# Altium PCB Main and Power management boad_V1.PcbDoc
Units mm, origin at the board's own origin, x right, y up, seen from the top; angles counter-clockwise.
Board outline 99 x 99 mm, 2 copper layers (Top Layer, Bottom Layer); 109 components, 71 nets, 442 pads, 379 vias.
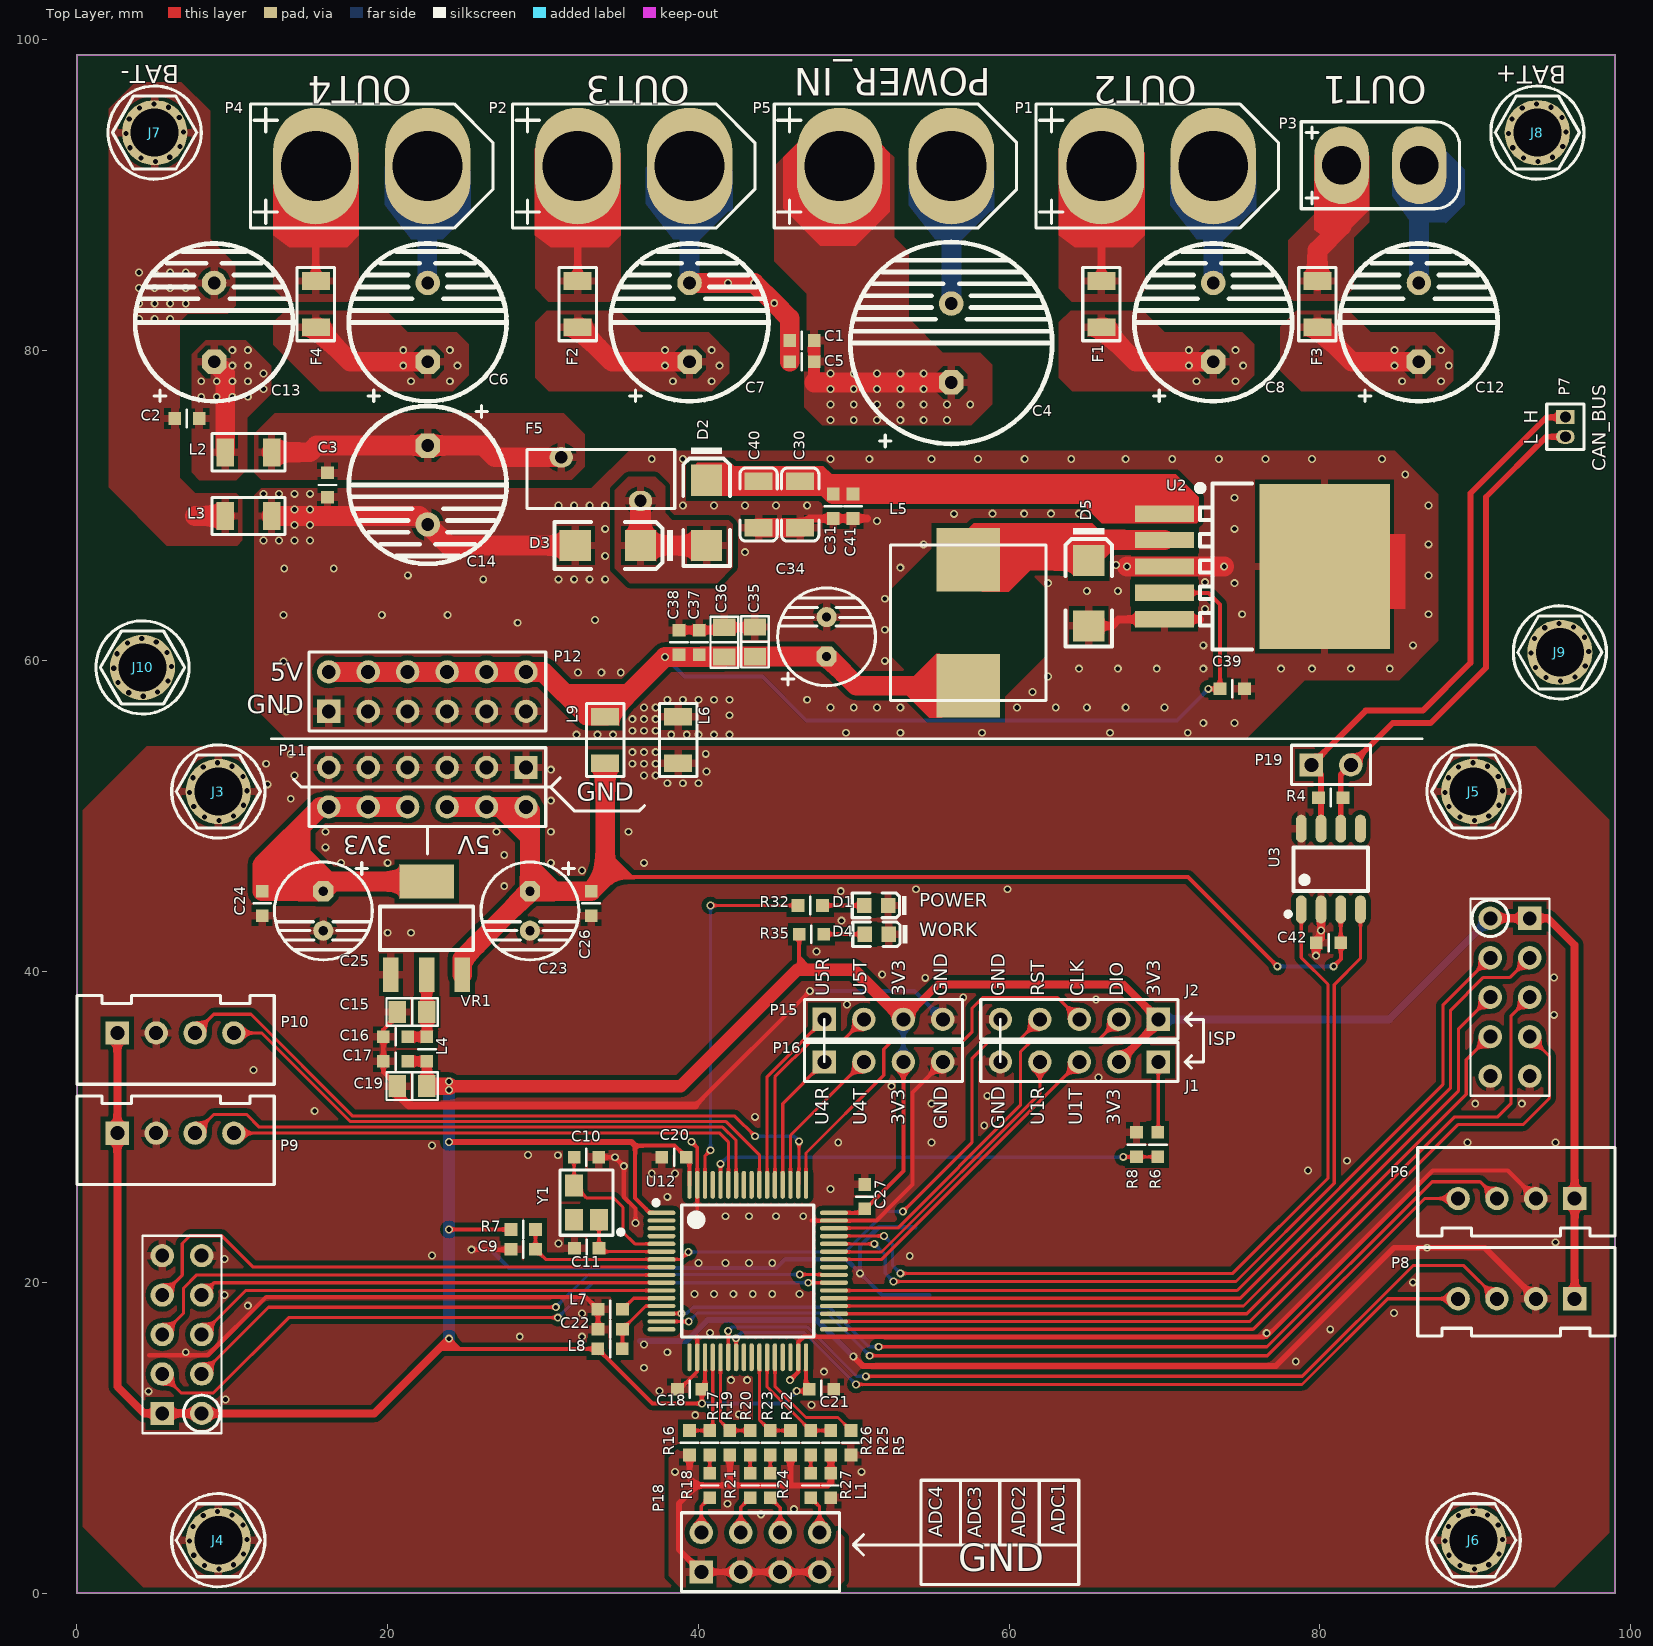
[diagram p0: Top Layer view]
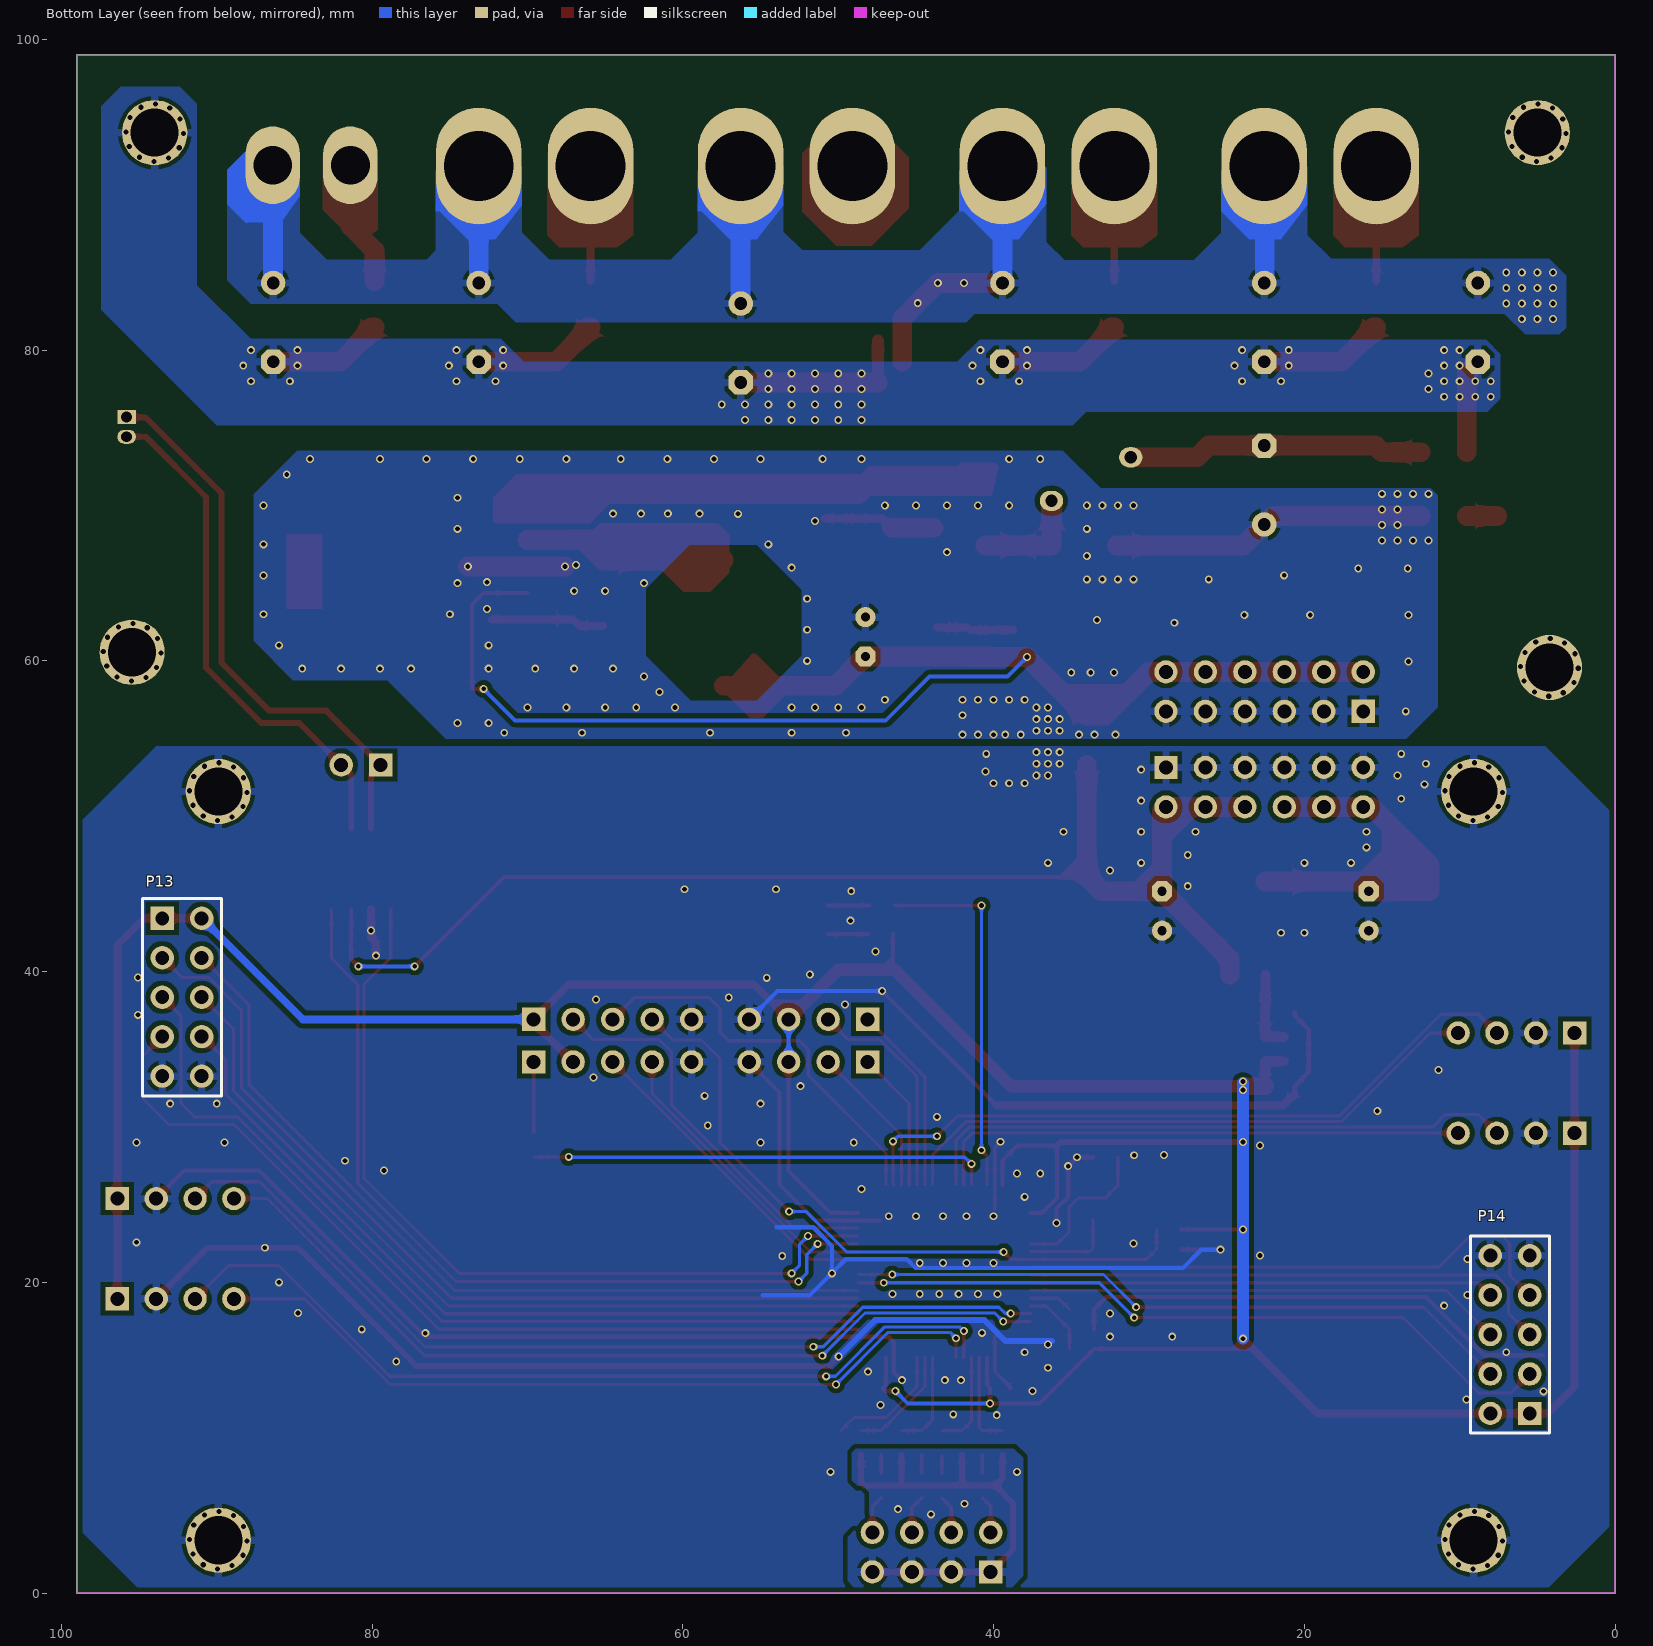
[diagram p1: Bottom Layer view, seen from below]

## Layer stack, top to bottom
Top Solder: solder mask 0.0102, Solder Resist, Dk 3.5
Top Layer: signal copper 0.0356
Dielectric 1: dielectric 0.32, FR-4, Dk 4.8
Bottom Layer: signal copper 0.0356
Bottom Solder: solder mask 0.0102, Solder Resist, Dk 3.5

## Board outline
0,0 99,0 99,99 0,99

## Design rules (kind name [scope] priority, off if disabled: settings)
Clearance Clearance_Polygon [InPolygon] p1: gap=0.305 ignorepadtopadclearanceinfootprint=FALSE
Clearance Clearance_all [All] p2: gap=0.152 ignorepadtopadclearanceinfootprint=FALSE
ComponentClearance [All] p1: gap=0 collisioncheckmode=3 verticalgap=0 showdistances=FALSE
HoleSize [All] p1 off: absolutevalues=TRUE maxlimit=2.54 minlimit=0.025 maxpercent=80.000 minpercent=20.000
HoleToHoleClearance [All] p1 off: gap=0.254 allowstackedmicrovias=TRUE
MinimumSolderMaskSliver [All] p1 off: minsoldermaskwidth=0.254
PolygonConnect PolygonConnect_via [IsVia] p1: connectstyle=Direct reliefconductorwidth=0.254 reliefentries=4 polygonreliefangle="90 Angle" airgapwidth=0.254
PolygonConnect Plane_all [All] p2: connectstyle=Relief reliefconductorwidth=0.508 reliefentries=4 polygonreliefangle="90 Angle" airgapwidth=0.254
RoutingVias [All] p1: holewidth=0.3 width=0.5 viastyle="Through Hole" minholewidth=0.305 minwidth=0.508 maxholewidth=3.2 maxwidth=6
SilkToSilkClearance [All] p1 off: silktosilkclearance=0.254
SilkToSolderMaskClearance [IsPad] p1 off: minsilkscreentomaskgap=0.254 clearancetoexposedcopper=TRUE
SolderMaskExpansion [All] p1 off: expansion=0.102
Width [All] p1: maxlimit=5.08 minlimit=0.152 preferedwidth=0.254
24 further rules are at their usual default settings.

## Components (designator, comment, footprint, x,y, rotation, side; value= is the part's Value field where it differs from the comment)
C1 "1uF 10% 50V" C1608(CC0603) 46.663,80.625 r180 top value=1uF/25V
C2 "1nF/50V" C1608(CC0603) 7.075,75.6 r0 top value="33pF 5%"
C3 "1nF/50V" C1608(CC0603) 16.125,71.32 r90 top value="33pF 5%"
C4 "1000uF/35V" RB.5/.13mm 56.275,80.46 r90 top locked value=KF102M025G200A
C5 "33pF/50V" C1608(CC0603) 46.663,79.258 r0 top value="33pF 5%"
C6 "470uF/35V" RB.5/.10mm 22.575,81.785 r90 top value=KF102M025G200A
C7 "470uF/35V" RB.5/.10mm 39.43,81.785 r90 top locked value=KF102M025G200A
C8 "470uF/35V" RB.5/.10mm 73.14,81.785 r90 top locked value=KF102M025G200A
C9 "1uF 10% 50V" C1608(CC0603) 28.726,22.13 r0 top value=0.1uF
C10 "22pF" C1608(CC0603) 32.787,28.05 r0 top value=100pF
C11 "22pF" C1608(CC0603) 32.814,22.2 r180 top value=100pF
C12 "470uF/35V" RB.5/.10mm 86.375,81.785 r90 top locked value=KF102M025G200A
C13 "470uF/35V" RB.5/.10mm 8.825,81.785 r90 top value=KF102M025G200A
C14 "470uF/35V" RB.5/.10mm 22.575,71.32 r270 top locked value=KF102M025G200A
C15 "10uF/25V/0805" C2012(CC0805) 21.572,37.4 r0 top
C16 "1nF/50V" C1608(CC0603) 20.513,35.8 r0 top value=1nF
C17 "1nF/50V" C1608(CC0603) 20.513,34.225 r0 top value=1nF
C18 "0.1uF" C1608(CC0603) 39.438,13.125 r0 top
C19 "10uF/25V/0805" C2012(CC0805) 21.572,32.625 r0 top
C20 "0.1uF" C1608(CC0603) 38.438,28.05 r0 top
C21 "0.1uF" C1608(CC0603) 47.912,13.125 r180 top
C22 "0.1uF" C1608(CC0603) 34.326,16.986 r0 top
C23 "47uF" RB.2.5/.6.3mm 29.157,43.905 r0 top value=47UF
C24 "0.1uF" C1608(CC0603) 11.925,44.388 r90 top
C25 "47uF" RB.2.5/.6.3mm 15.857,43.905 r0 top value=47UF
C26 "0.1uF" C1608(CC0603) 33.093,44.388 r90 top
C27 "0.1uF" C1608(CC0603) 50.7,25.512 r270 top
C30 "10uF/50V/1206" LC-1206_C 46.55,70.06 r90 top
C31 "1uF 10% 50V" C1608(CC0603) 48.675,69.95 r90 top value=4.7uF/25V/0603
C34 "220uF/10V" RB.2.5/.6.3mm 48.25,61.55 r180 top value=KF102M025G200A
C35 "22uF/10V/0805" C2012(CC0805) 43.639,61.225 r270 top value=22uF/25V/0805
C36 "22uF/10V/0805" C2012(CC0805) 41.664,61.2 r270 top value=22uF/25V/0805
C37 "1uF 10% 50V" C1608(CC0603) 40.05,61.19 r90 top value=1uF/25V
C38 "33pF/50V" C1608(CC0603) 38.75,61.19 r270 top value="33pF 5%"
C39 ".nc" C1608(CC0603) 74.362,58.2 r180 top value="33pF 5%"
C40 "10uF/50V/1206" LC-1206_C 43.875,70.06 r90 top
C41 "33pF/50V" C1608(CC0603) 49.95,69.95 r90 top value=0.1uF
C42 "0.1uF" C1608(CC0603) 80.563,41.85 r0 top
D1 "红灯 0805" LC-0603_LED_S1 51.435,44.257 r180 top
D2 "SS54" LC-SMA(DO-214AC)_S5 40.525,69.525 r270 top
D3 "SS54" LC-SMA(DO-214AC)_S5 34.175,67.425 r180 top
D4 "红灯 0805" LC-0603_LED_S1 51.47,42.4 r180 top
D5 "SS54" LC-SMA(DO-214AC)_S5 65.125,64.35 r270 top
F1 "15A/63V" LC-1206_L 65.94,82.96 r90 top
F2 "15A/63V" LC-1206_L 32.23,82.96 r90 top
F3 "15A/63V" LC-1206_L 79.842,82.96 r90 top
F4 "15A/63V" LC-1206_L 15.375,82.96 r90 top locked
F5 "1A" 自恢复保险丝9.5*3.1 33.725,71.7 r270 top
J1 "串口1" HDR1X5 69.6,34.185 r180 top
J2 "DEBUG" HDR1X5 69.6,36.925 r180 top
J3 "定位孔" M3铜柱孔(小孔) 9.1,51.59 r0 top locked
J4 "定位孔" M3铜柱孔(小孔) 9.1,3.4 r0 top locked
J5 "定位孔" M3铜柱孔(小孔) 89.9,51.59 r0 top locked
J6 "定位孔" M3铜柱孔(小孔) 89.9,3.4 r0 top locked
J7 "定位孔" M3铜柱孔(小孔) 5,94 r0 top locked
J8 "定位孔" M3铜柱孔(小孔) 94,94 r0 top locked
J9 "定位孔" M3铜柱孔(小孔) 95.45,60.55 r0 top
J10 "定位孔" M3铜柱孔(小孔) 4.22,59.579 r0 top
L1 "磁珠" C1608(CC0603) 48.526,6.921 r270 top value=10mH
L2 "600Ω ±25% 100MHz" LC-1206_L 11.035,73.425 r0 top
L3 "600Ω ±25% 100MHz" LC-1206_L 11.035,69.325 r0 top
L4 "CBW160808U601" C1608(CC0603) 22.525,35.013 r270 top
L5 "47uH ±20% 2.8A" IND10X10 57.372,62.45 r90 top
L6 "600Ω ±25% 100MHz" LC-1206_L 38.7,54.91 r270 top
L7 "CBW160808U601" C1608(CC0603) 34.326,18.257 r180 top
L8 "CBW160808U601" C1608(CC0603) 34.314,15.716 r0 top
L9 "600Ω ±25% 100MHz" LC-1206_L 34,54.91 r90 top
P1 "电机12" XT60 69.54,91.85 r0 top locked
P2 "电机34" XT60 35.83,91.85 r0 top locked
P3 "云台电机" XT30 83.9,91.9 r0 top locked
P4 "预留" XT60 18.975,91.85 r0 top locked
P5 "锂电池" XT60 52.685,91.85 r0 top locked
P6 "码盘信号1" XH2.54-4A 96.4,25.39 r180 top locked
P7 "CAN总线接口" IDC2X1-1.27 95.804,75.695 r270 top
P8 "码盘信号2" XH2.54-4A 96.4,18.94 r180 top locked
P9 "码盘信号3" XH2.54-4A 2.6,29.6 r0 top locked
P10 "码盘信号4" XH2.54-4A 2.6,36.05 r0 top locked
P11 "3.3V/1A输出" HDR2X6 28.906,53.14 r180 top
P12 "3.3V/1A输出" HDR2X6 16.206,56.75 r0 top
P13 "电机驱动板接口12" HDR2X5 93.51,43.43 r270 bottom locked
P14 "电机驱动板接口34" HDR2X5 5.49,11.56 r90 bottom locked
P15 "串口3" HDR1X4 48.11,36.925 r0 top
P16 "串口4" HDR1X4 48.11,34.185 r0 top
P18 "ADC采样接口" HDR2X4 40.185,1.358 r0 top
P19 "CAN总线接口" HDR1X2 79.45,53.3 r0 top
R4 "120R" C1608(CC0603) 80.7,51.2 r180 top value=2.2K
R5 "1K" C1608(CC0603) 49.825,9.671 r270 top locked value=2.2K
R6 "2.2K" C1608(CC0603) 69.575,28.863 r90 top
R7 "10K" C1608(CC0603) 28.726,23.4 r0 top
R8 "47K" C1608(CC0603) 68.2,28.862 r270 top
R16 "10k" C1608(CC0603) 39.43,9.671 r270 top locked
R17 "120K" C1608(CC0603) 40.729,9.671 r90 top locked
R18 "0R" C1608(CC0603) 40.725,6.921 r90 top
R19 "10k" C1608(CC0603) 42.029,9.671 r270 top locked
R20 "120K" C1608(CC0603) 43.328,9.671 r90 top locked
R21 "0R" C1608(CC0603) 43.33,6.921 r90 top
R22 "10k" C1608(CC0603) 45.927,9.671 r270 top locked
R23 "120K" C1608(CC0603) 44.627,9.671 r90 top locked
R24 "0R" C1608(CC0603) 44.627,6.921 r90 top
R25 "10k" C1608(CC0603) 48.526,9.671 r270 top locked
R26 "120K" C1608(CC0603) 47.226,9.671 r90 top locked
R27 "0R" C1608(CC0603) 47.226,6.921 r90 top
R32 "1K" C1608(CC0603) 47.198,44.257 r180 top
R35 "1K" C1608(CC0603) 47.273,42.407 r180 top
U2 "LM2596SX-5.0/NOPB" LC-TO-263-5 70,66.075 r180 top
U3 "CAN/TJA1050T/CM" LC-SOIC-8_150mil 80.71,46.6 r0 top
U12 "STM32F103RCT6" LC-LQFP-64_10x10x05P 43.175,20.725 r270 top locked
VR1 "CJT1117B-3.3" LC-SOT-223 22.507,42.8 r270 top
Y1 "8MHz" LC-SMD-3225_4P 32.801,25.132 r90 top

## Footprints (in the part's own frame and the unit in brackets; to place one, negate y for a bottom-side part, rotate by r counter-clockwise, add the part's x,y. Pads: shape width x height; smd on the part's side, far side on the other; paste and mask are expansions set on the pad)
C1608(CC0603) [mil]
  rect 32x32 smd: 1(-31,0) 2(31,0)
  silkscreen extent 0,-22 0,22
C2012(CC0805) [mil]
  rect 44x56 smd: 1(-37.5,0) 2(37.5,0)
  silkscreen extent -65,-35 65,35
HDR1X2 [mm] "Connector; Header; 2 Position"
  rect 1.5x1.5 hole 0.9: 1(0,0)
  round 1.5 hole 0.9: 2(2.54,0)
  silkscreen extent -1.27,-1.27 3.81,1.27
HDR1X4 [mm] "Connector; Header; 4 Position"
  rect 1.5x1.5 hole 0.9: 1(0,0)
  round 1.5 hole 0.9: 2(2.54,0) 3(5.08,0) 4(7.62,0)
  silkscreen extent -1.27,-1.27 8.89,1.27
HDR1X5 [mm] "Connector; Header; 5 Position"
  rect 1.5x1.5 hole 0.9: 1(0,0)
  round 1.5 hole 0.9: 2(2.54,0) 3(5.08,0) 4(7.62,0) 5(10.16,0)
  silkscreen extent -1.27,-1.27 11.43,1.27
HDR2X4 [mm] "Connector; Header; 4x2 Position"
  rect 1.5x1.5 hole 0.9: 1(0,0)
  round 1.5 hole 0.9: 2(0,2.54) 3(2.54,0) 4(2.54,2.54) 5(5.08,0) 6(5.08,2.54) 7(7.62,0) 8(7.62,2.54)
  silkscreen extent -1.27,-1.27 8.89,3.81
HDR2X5 [mm] "Connector; Header; 5x2 Position"
  rect 1.5x1.5 hole 0.9: 1(0,0)
  round 1.5 hole 0.9: 2(0,2.54) 3(2.54,0) 4(2.54,2.54) 5(5.08,0) 6(5.08,2.54) 7(7.62,0) 8(7.62,2.54) 9(10.16,0) 10(10.16,2.54)
  silkscreen extent -1.27,-1.27 11.43,3.81
HDR2X6 [mm] "Connector; Header; 6x2 Position"
  rect 1.5x1.5 hole 0.9: 1(0,0)
  round 1.5 hole 0.9: 2(0,2.54) 3(2.54,0) 4(2.54,2.54) 5(5.08,0) 6(5.08,2.54) 7(7.62,0) 8(7.62,2.54) 9(10.16,0) 10(10.16,2.54) 11(12.7,0) 12(12.7,2.54)
  silkscreen extent -1.27,-1.27 13.97,3.81
IDC2X1-1.27 [mm]
  rect 0.9x1.2 hole 0.7: 1(0,0)
  oval 0.9x1.2 hole 0.7: 2(1.27,0)
  silkscreen extent -0.83,-1.2 2.1,1.2
IND10X10 [mm]
  rect 4.1x4.1 smd: 1(4.05,0) 2(-4.05,0)
  silkscreen extent -5,-5 5,5
LC-0603_LED_S1 [mm]
  rect 0.93x0.98 smd: A(0.77,0) K(-0.77,0)
  silkscreen extent -1.97,-0.79 1.54,0.79, body extent -0.8,-0.4 0.8,0.4, height 0.6
LC-1206_C [mm]
  rect 1.13x1.8 smd: 1(-1.49,0) 2(1.49,0)
  silkscreen extent -2.36,-1.2 2.35,1.2, body extent -1.6,-0.81 1.6,0.79, height 1
LC-1206_L [mm]
  rect 1.13x1.8 smd: 1(-1.49,0) 2(1.49,0)
  silkscreen extent -2.36,-1.2 2.35,1.2
LC-LQFP-64_10x10x05P [mm]
  oval 0.28x1.8 smd mask+0.051: 1(-3.75,-5.55) 2(-3.25,-5.55) 3(-2.75,-5.55) 4(-2.25,-5.55) 5(-1.75,-5.55) 6(-1.25,-5.55) 7(-0.75,-5.55) 8(-0.25,-5.55) 9(0.25,-5.55) 10(0.75,-5.55) 11(1.25,-5.55) 12(1.75,-5.55) 13(2.25,-5.55) 14(2.75,-5.55) 15(3.25,-5.55) 16(3.75,-5.55) 33(3.75,5.55) 34(3.25,5.55) 35(2.75,5.55) 36(2.25,5.55) 37(1.75,5.55) 38(1.25,5.55) 39(0.75,5.55) 40(0.25,5.55) 41(-0.25,5.55) 42(-0.75,5.55) 43(-1.25,5.55) 44(-1.75,5.55) 45(-2.25,5.55) 46(-2.75,5.55) 47(-3.25,5.55) 48(-3.75,5.55)
  oval 1.8x0.28 smd mask+0.051: 17(5.55,-3.75) 18(5.55,-3.25) 19(5.55,-2.75) 20(5.55,-2.25) 21(5.55,-1.75) 22(5.55,-1.25) 23(5.55,-0.75) 24(5.55,-0.25) 25(5.55,0.25) 26(5.55,0.75) 27(5.55,1.25) 28(5.55,1.75) 29(5.55,2.25) 30(5.55,2.75) 31(5.55,3.25) 32(5.55,3.75) 49(-5.55,3.75) 50(-5.55,3.25) 51(-5.55,2.75) 52(-5.55,2.25) 53(-5.55,1.75) 54(-5.55,1.25) 55(-5.55,0.75) 56(-5.55,0.25) 57(-5.55,-0.25) 58(-5.55,-0.75) 59(-5.55,-1.25) 60(-5.55,-1.75) 61(-5.55,-2.25) 62(-5.55,-2.75) 63(-5.55,-3.25) 64(-5.55,-3.75)
  silkscreen extent -4.55,-6.05 4.25,4.25
LC-SMA(DO-214AC)_S5 [mm]
  rect 2x2 smd: 1(2.1,0) 2(-2.1,0)
  silkscreen extent -4.2,-1.5 3.43,1.5
LC-SMD-3225_4P [mm]
  rect 1.4x1.15 smd: 1(-1.1,-0.8) 3(1.1,0.8) 4(-1.1,0.8)
  rect 1.4x1.15 on Top Overlay: 2(1.1,-0.8)
  silkscreen extent -2.1,-2.35 2.1,1.7, body extent -1.6,-1.25 1.6,1.25, height 0.61
LC-SOIC-8_150mil [mm]
  oval 0.7x1.8 smd: 1(-1.905,-2.6) 2(-0.635,-2.6) 3(0.635,-2.6) 4(1.905,-2.6) 5(1.905,2.6) 6(0.635,2.6) 7(-0.635,2.6) 8(-1.905,2.6)
  silkscreen extent -2.9,-3.05 2.4,1.4
LC-SOT-223 [mm]
  rect 2.2x1 smd: 1(3,-2.3) 2(3,0) 3(3,2.3)
  rect 2.2x3.5 smd: 2(-3,0)
  silkscreen extent -1.4,-3 1.4,3, body extent -3.49,-3.24 3.49,3.24, height 1.64
LC-TO-263-5 [mm]
  rect 8.4x10.65 smd: 0(-10.3,0)
  rect 3.8x1.05 smd: 1(0,-3.4) 2(0,-1.7) 3(0,0) 4(0,1.7) 5(0,3.4)
  silkscreen extent -5.65,-5.35 -2.1,5.35
M3铜柱孔(小孔) [mm]
  round 0.406 hole 0.33: 1(-1.854,-0.051) 1(-1.631,0.883) 1(-1.58,-0.971) 1(-0.971,1.58) 1(-0.883,-1.631) 1(-0.051,1.854) 1(0.051,-1.854) 1(0.883,1.631) 1(0.971,-1.58) 1(1.58,0.971) 1(1.631,-0.883) 1(1.854,0.051)
  round 4.2 hole 3.1: 1(0,0)
  silkscreen extent -3,-3 3,3
RB.2.5/.6.3mm [mm]
  oct 1.3x1.3 hole 0.6: 1(0,1.27)
  round 1.3 hole 0.6: 2(0,-1.27)
  silkscreen extent -3.15,-3.15 3.15,3.15
RB.5/.10mm [mil]
  oct 62x62 hole 32: 1(-100,0)
  round 62 hole 32: 2(100,0)
  silkscreen extent -201,-200 200,200
RB.5/.13mm [mil]
  oct 62x62 hole 32: 1(-100,0)
  round 62 hole 32: 2(100,0)
  silkscreen extent -263,-256 256,256
XH2.54-4A [mm]
  rect 1.5x1.5 hole 0.9: 1(0,0)
  round 1.5 hole 0.9: 2(2.5,0) 3(5,0) 4(7.5,0)
  silkscreen extent -2.6,-3.3 10.1,2.4
XT30 [mm]
  oval 3.5x5 hole 2.5: 1(-2.5,0) 2(2.5,0)
  silkscreen extent -5.1,-2.8 5.1,2.8
XT60 [mm] "锂电池插头"
  oval 5.5x7.5 hole 4.5: 1(-3.6,0) 2(3.6,0)
  silkscreen extent -7.8,-4 7.8,4
自恢复保险丝9.5*3.1 [mm]
  oval 1.3x1.5 hole 0.8: 1(1.4,2.55) 2(-1.4,-2.55)
  silkscreen extent -1.9,-4.75 1.9,4.75

## Part data
C1 C2 C3 C5 C9 C10 C11 C15 C16 C17 C18 C19 C20 C21 C22 C24 C26 C27 C30 C31 C35 C36 C37 C38 C39 C40 C41 C42: library part Cap, "Capacitor", LatestRevisionDate=17-Jul-2002, LatestRevisionNote="Re-released for DXP Platform.", Published=8-Jun-2000, Publisher="Altium Limited"
  C1 C2 C3 C5 C15 C16 C17 C19 C30 C31 C35 C36 C37 C38 C39 C40 C41: PackageReference=RAD-0.3
  C9 C18 C20 C21 C22 C24 C26 C27 C42: PackageDescription="Radial Cap, Thru-Hole; 2 Leads; 0.3 in Pin Spacing", PackageReference=RAD-0.3
C4 C6 C7 C8 C12 C13 C14 C34: library part "Cap Pol1", "Polarized Capacitor (Radial)", LatestRevisionDate=17-Jul-2002, LatestRevisionNote="Re-released for DXP Platform.", PackageDescription="Polarized Capacitor (Radial); 2 Leads", PackageReference=RB7.6-15, Published=8-Jun-2000, Publisher="Altium Limited"
C23 C25: library part "Cap Pol2", "Polarized Capacitor (Axial)", LatestRevisionDate=17-Jul-2002, LatestRevisionNote="Re-released for DXP Platform.", PackageDescription="Polarized Capacitor; 2 Leads", PackageReference=POLAR0.8, Published=8-Jun-2000, Publisher="Altium Limited"
D1 D4: library part "0805 红灯", "发光二极管", Package=0805, SuppliersPartNumber=C2295, ComponentLink1Description=供应商, ComponentLink1URL=http://www.szlcsc.com/product/details_2668.html, Supplier=LC
D2 D3 D5: library part "SMA(DO-214AC) M7", "二极管", Package=SMA(DO-214AC), SuppliersPartNumber=C2464, ComponentLink1Description=供应商, ComponentLink1URL=http://www.szlcsc.com/product/details_2841.html, Supplier=LC
F1 F2 F3 F4 F5: library part "Fuse 1", "Fuse", LatestRevisionDate=17-Jul-2002, LatestRevisionNote="Re-released for DXP Platform.", PackageDescription="Thru-Hole; 2 Leads", PackageReference=PIN-W2/E2.8, Published=8-Jun-2000, Publisher="Altium Limited"
J1 J2: library part "Header 5", "Header, 5-Pin", LatestRevisionDate=17-Jul-2002, LatestRevisionNote="Re-released for DXP Platform.", Publisher="Altium Limited"
L1 L4 L7 L8: library part Inductor, "Inductor", Code_IEC=1005, Code_JEITA=0402, LatestRevisionDate=29-May-2009, LatestRevisionNote="IPC-7351 Footprint Added.", PackageDescription="Chip Inductor", PackageReference=0402-A, Published=8-Jun-2000, Publisher="Altium Limited"
L2 L3 L6 L9: library part "0805 600Ω 25% 100MHz", "贴片磁珠", Package=0805, SuppliersPartNumber=C1017, ComponentLink1Description=供应商, ComponentLink1URL=http://www.szlcsc.com/product/details_1369.html, Supplier=LC
L5: library part "0805 1uH 10%", "贴片电感", Package=0805, SuppliersPartNumber=C1042, ComponentLink1Description=供应商, ComponentLink1URL=http://www.szlcsc.com/product/details_1394.html, Supplier=LC
P1 P2 P3 P4 P5 P7 P19: library part "Header 2", "Header, 2-Pin", LatestRevisionDate=17-Jul-2002, LatestRevisionNote="Re-released for DXP Platform.", Publisher="Altium Limited"
P6 P8 P9 P10 P15 P16: library part "Header 4", "Header, 4-Pin", LatestRevisionDate=17-Jul-2002, LatestRevisionNote="Re-released for DXP Platform.", Publisher="Altium Limited"
P11 P12: library part "Header 6X2", "Header, 6-Pin, Dual row", LatestRevisionDate=17-Jul-2002, LatestRevisionNote="Re-released for DXP Platform.", Publisher="Altium Limited"
P13 P14: library part "Header 5X2", "Header, 5-Pin, Dual row", LatestRevisionDate=17-Jul-2002, LatestRevisionNote="Re-released for DXP Platform.", Publisher="Altium Limited"
P18: library part "Header 4X2", "Header, 4-Pin, Dual row", LatestRevisionDate=17-Jul-2002, LatestRevisionNote="Re-released for DXP Platform.", Publisher="Altium Limited"
R4 R5 R6 R8: library part Res2, "Resistor", LatestRevisionDate=17-Jul-2002, LatestRevisionNote="Re-released for DXP Platform.", PackageReference=AXIAL-0.4, Published=8-Jun-2000, Publisher="Altium Limited"
R7 R16 R17 R18 R19 R20 R21 R22 R23 R24 R25 R26 R27 R32 R35: library part RES5
U2: "DC-DCоƬ", Package=TO-263-5, SuppliersPartNumber=C10002, ComponentLink1Description=供应商, ComponentLink1URL=http://www.szlcsc.com/product/details_10538.html, Supplier=LC
U3: "CAN", Package=SOIC-8_150mil, SuppliersPartNumber=C6952, ComponentLink1Description=供应商, ComponentLink1URL=http://www.szlcsc.com/product/details_7424.html, Supplier=LC
U12: "STM32 ARM-based 32-bit MCU with 128 Kbytes Flash, 64-pin LQFP", ComponentLink1Description="Manufacturer Link", ComponentLink1URL=www.st.com/stm32, ComponentLink2Description=Datasheet, ComponentLink2URL=http://www.st.com/stonline/products/literature/ds/13587.pdf, DatasheetVersion="rev6, Mar-2008", PackageDescription="64-Pin Low-Profile Quad Flat Pack, 10 x 10 mm Body, 0.5 mm Pitch (LQFP64)", PackageReference=LQFP64, PackageVersion=Mar-2008, Published=30-May-2008, Publisher="Altium Limited"
VR1: library part "SOT-223 AMS1117-3.3", "低压差线性稳压(LDO)", Package=SOT-223, SuppliersPartNumber=C6186, ComponentLink1Description=供应商, ComponentLink1URL=http://www.szlcsc.com/product/details_6652.html, Supplier=LC
Y1: library part "SMD-3225_4P  16MHZ 9PF 10PPM", "贴片晶振", Package=SMD-3225_4P, SuppliersPartNumber=C13738, ComponentLink1Description=供应商, ComponentLink1URL=http://www.szlcsc.com/product/details_14393.html, Supplier=LC

## Via types
v1: diameter 0.508, hole 0.305, Top Layer to Bottom Layer, tented both sides, 379 vias

## Nets (pads, with @x,y where several pads share a name; then routed paths per layer and width w, separated by ;. In a path a pad name is that pad's centre, name@x,y a point inside that pad or via, vN(x,y) a via of type N, cw(c..) or ccw(c..) an arc to the next point about the centre after c; other vN are vias at no path point)
1_Encoder_AO: P6.3 U12.14 | length 59.9
  Top Layer w0.203: U12.14 37.65,18 v1(38.9,18) ; v1(51.6,15.85) 76.6,15.85 87.225,26.475 90.315,26.475 P6.3
  Bottom Layer w0.203: v1(38.9,18) 39.25,18 39.65,18.4 48.425,18.4 50.975,15.85 v1(51.6,15.85)
1_Encoder_BO: P6.4 U12.15 | length 56.8
  Top Layer w0.203: U12.15 v1(39.375,17.475) ; v1(51.025,15.275) 76.575,15.275 76.622,15.275 86.737,25.39 P6.4
  Bottom Layer w0.203: v1(39.375,17.475) 39.925,18.025 48.275,18.025 v1(51.025,15.275)
1_IN1: P13.5 U12.34 | length 56.7
  Top Layer w0.203: U12.34 75.5,17.475 83.85,25.825 88.675,30.65 91.45,30.65 92.297,31.497 92.297,37.137 P13.5
1_IN2: P13.7 U12.33 | length 56.7
  Top Layer w0.203: U12.33 75.707,16.975 88.882,30.15 93.075,30.15 94.78,31.855 94.78,34.54 P13.7
1_PWM: P13.3 U12.37 | length 56.8
  Top Layer w0.203: U12.37 74.879,18.975 88.419,32.516 88.419,37.519 90.525,39.625 92.245,39.625 P13.3
2_Encoder_AO: P8.3 U12.22 | length 56.4
  Top Layer w0.203: v1(41.917,16.867) 41.917,15.183 U12.22 ; v1(50.775,13.95) 78.872,13.95 85.997,21.075 89.265,21.075 P8.3
  Bottom Layer w0.203: v1(41.917,16.867) 42.181,17.131 46.994,17.131 50.175,13.95 v1(50.775,13.95)
2_Encoder_BO: P8.4 U12.23 | length 51.5
  Top Layer w0.203: U12.23 v1(42.425,16.4) ; v1(50.15,13.425) 78.85,13.425 84.365,18.94 P8.4
  Bottom Layer w0.203: v1(42.425,16.4) 42.8,16.775 46.8,16.775 v1@50.125,13.45
2_IN1: P13.6 U12.36 | length 52.8
  Top Layer w0.203: U12.36 75.086,18.475 88.919,32.308 88.919,36.299 P13.6
2_IN2: P13.8 U12.35 | length 50.9
  Top Layer w0.203: U12.35 75.293,17.975 89.419,32.101 89.419,34.324 90.905,35.81 P13.8
2_PWM: P13.4 U12.38 | length 54.1
  Top Layer w0.203: U12.38 74.672,19.475 87.919,32.723 87.919,37.844 90.965,40.89 P13.4
3_Encoder_AO: P9.3 U12.58 | length 38.9
  Top Layer w0.203: P9.3 8.8,30.8 10.925,30.8 11.736,29.989 41.561,29.989 42.425,29.125 U12.58
3_Encoder_BO: P9.4 U12.59 | length 34.8
  Top Layer w0.203: P9.4 41.375,29.6 41.933,29.042 41.933,27.05 41.925,27.042 U12.59
3_IN1: P14.5 U12.9 | length 34.7
  Top Layer w0.203: P14.5 6.854,18.004 6.854,19.625 7.704,20.475 25.025,20.475 U12.9
3_IN2: P14.7 U12.8 | length 35.7
  Top Layer w0.203: P14.7 6.775,20.465 6.775,22.5 7.275,23 9.325,23 11.35,20.975 U12.8
3_PWM: P14.3 U12.39 | length 46.7
  Top Layer w0.203: P14.3 6.715,12.875 8.775,12.875 13.625,17.725 v1(30.95,17.725) ; v1(47.07,19.975) U12.39
  Bottom Layer w0.203: v1(30.95,17.725) 33.2,19.975 v1(47.07,19.975)
4_Encoder_AO: P10.3 U12.50 | length 45.6
  Top Layer w0.203: P10.3 8.8,37.25 11.203,37.25 17.753,30.7 42.35,30.7 v1(43.65,29.4) ; U12.50 46.475,26.325 v1(46.475,29.075)
  Bottom Layer w0.203: v1(43.65,29.4) 46.15,29.4 v1(46.475,29.075)
4_Encoder_BO: P10.4 U12.55 | length 39
  Top Layer w0.203: P10.4 11.9,36.05 17.606,30.344 41.781,30.344 43.925,28.2 U12.55
4_IN1: P14.6 U12.11 | length 30.8
  Top Layer w0.203: P14.6 10.865,19.475 U12.11
4_IN2: P14.8 U12.10 | length 29.9
  Top Layer w0.203: P14.8 8.825,19.975 U12.10
4_PWM: P14.4 U12.40 | length 43.3
  Top Layer w0.203: P14.4 12.33,18.4 v1(30.825,18.4) ; v1(46.525,20.5) U12.40@48.7,20.5
  Bottom Layer w0.203: v1(30.825,18.4) 32.925,20.5 v1(46.525,20.5)
ADC1: R16.1 R17.2 U12.20 | length 6.1
  Top Layer w0.203: R16.1 R17.2 40.925,10.654 U12.20
ADC1_IN: P18.2 R18.1 | length 2.5
  Top Layer w0.203: P18.2 40.185,5.594 R18.1
ADC2: R19.1 R20.2 U12.21 | length 6.3
  Top Layer w0.203: U12.21 41.425,11.062 R19.1 R20.2
ADC2_IN: P18.4 R21.1 | length 2.5
  Top Layer w0.203: P18.4 42.725,5.529 R21.1
ADC3: R22.1 R23.2 U12.26 | length 6.3
  Top Layer w0.203: U12.26 43.925,11.161 R23.2 R22.1
ADC3_IN: P18.6 R24.1 | length 2.5
  Top Layer w0.203: R24.1 45.265,5.496 P18.6
ADC4: R25.1 R26.2 U12.27 | length 7.2
  Top Layer w0.203: U12.27 44.425,13.26 R26.2 R25.1
ADC4_IN: P18.8 R27.1 | length 2.5
  Top Layer w0.203: R27.1 47.805,5.554 P18.8
AGND: L1.1 P18.1 P18.3 P18.5 P18.7 R16.2 R19.2 R22.2 R25.2 | length 30.8
  Top Layer w0.381: R16.2 39.43,7.395 39.9,6.925 ; R19.2 42.029,6.925 ; 45.927,6.948 R22.2 ; P18.7 P18.5 P18.3 P18.1 38.75,2.793 38.75,5.775 39.9,6.925 ; R25.2 L1.1 48.526,7.126 48.325,6.925 42.029,6.925 ; 39.9,6.925 42.029,6.925
  other v1: 44.036,5.064 46.154,5.4 41.874,5.75 38.5,7.8
BOOT0: R6.1 R8.2 U12.60 | length 29.7
  Top Layer w0.203: U12.60 v1(41.425,27.625) ; v1(67.345,28.075) R8.2 R6.1
  Bottom Layer w0.203: v1(41.425,27.625) 41.85,28.05 v1@67.345,28.05
CANRX: U3.4 U12.44 | length 54.8
  Top Layer w0.203: U12.44 v1(51.325,22.475) ; v1(52.553,20.051) 74.601,20.051 80.925,26.375 80.925,39.16 82.615,40.85 U3.4
  Bottom Layer w0.203: v1(51.325,22.475) 52.025,21.775 52.025,20.579 v1(52.553,20.051)
CANTX: U3.1 U12.45 | length 54.1
  Top Layer w0.203: U12.45 48.733,22.983 v1(51.942,22.983) ; v1(53,20.575) 74.4,20.575 80.525,26.7 80.525,39.18 78.805,40.9 U3.1
  Bottom Layer w0.203: v1(51.942,22.983) 52.5,22.425 52.5,21.075 v1(53,20.575)
DEBUG_RX: J1.4 U12.43 | length 19.5
  Top Layer w0.203: U12.43@48.725,21.95 51.782,21.95 61.98,32.148 J1.4
DEBUG_TX: J1.3 U12.42 | length 21.1
  Top Layer w0.203: U12.42 51.81,21.475 J1.3
DGND: C9.1 C10.2 C11.2 C15.1 C16.1 C17.1 C18.1 C19.1 C20.1 C21.1 C22.1 C23.2 C24.1 C25.2 C26.1 C27.1 C42.1 D1.K D4.K J1.5 J2.5 J3.1 J4.1 J5.1 J6.1 J9.1 J10.1 L1.2 L6.2 L7.2 P6.2 P8.2 P9.2 P10.2 P11.1 P11.3 P11.5 P11.7 P11.9 P11.11 P13.9 P13.10 P14.9 P14.10 P15.4 P16.4 R5.2 R8.1 U3.2 U3.8 U12.18 U12.31 U12.47 U12.63 VR1.1 | length 269.5
  Top Layer w0.254: C18.1@38.875,13.2 39.925,14.25 U12.18 39.925,16.5 ; v1(39.55,29.05) 39.925,28.675 U12.63 39.925,24.725 ; 47.274,23.975 U12.47 51.45,23.975 53.775,26.3 53.775,32.23 P16.4
  Top Layer w0.28: 4.65,15.3 8.425,15.3 12.175,19.05 32.746,19.05 L7.2 C22.1 ; C19.1@20.62,32.116 C19.1 19.725,33.519 C17.1 C16.1 19.725,36.275 20.62,37.17 C15.1 ; v1(25.4,22.1) 27.909,22.1 C9.1 ; C10.2 v1(34.625,28.05) v1(35.2,27.475) 35.2,25.5 35.95,24.75 v1(35.95,23.825) ; 39.8,31.375 v1(47.175,38.75) ; v1(45.9,13.7) 46.425,14.225 U12.31 46.425,16.15 46.775,16.5 76.565,16.5 87.265,27.2 92.09,27.2 P6.2
  Top Layer w0.381: v1(49.975,15.225) 50.575,14.625 77.175,14.625 84.775,22.225 v1(86.909,22.225) 90.615,22.225 P8.2
  Top Layer w0.508: C19.1@20.62,32.116 21.361,31.375 39.8,31.375 ; v1(79.75,41.025) 79.75,41.85 80.075,42.175 v1(80.075,42.65) U3.2
  Bottom Layer w0.28: v1(25.4,22.1) 26.634,22.1 27.809,20.925 45.025,20.925 45.581,21.481 49.519,21.481 v1@50.4,20.6 ; v1(47.175,38.75) 53.905,38.75 P15.4 ; v1(50.4,20.575) v1@50.4,20.6 ; 53.975,23.55 51.609,23.55 50.4,22.341 v1@50.4,20.6 ; 54.85,19.175 51.825,19.175 v1@50.4,20.6
  Bottom Layer w0.381: 36.25,16.225 39.244,16.225 40.594,17.575 47.625,17.575 v1(49.975,15.225)
  other v1: 50.499,7.8 39.8,11.45 42.6,11.5 47.275,12.1 9.568,12.464 4.6,12.983 37.5,13 42.1,13.7 43.139,13.7 48.08,14.25 36.5,14.5 78.45,14.9 7,15.5 38,15.5 36.5,16 28.5,16.5 32.5,16.5 76.575,16.725 40.75,16.75 80.669,16.975 32.5,18 84.775,18.019 11,18.5 9.5,19.18 39.75,19.25 41,19.25 42.25,19.25 43.5,19.25 44.75,19.25 46.5,19.25 86,20 40,21.25 41.75,21.25 43.25,21.25 44.75,21.25 9.5,21.5 53.6,21.7 22.847,21.725 31,22.5 95.163,22.575 40,24.25 41.75,24.25 43.25,24.25 45,24.25 46.75,24.25 38,25.5 48.5,26 37,27 38.5,27 79.241,27.2 81.75,27.825 30.95,28.176 29.033,28.2 22.847,28.8 49,29 55,29 89.5,29 95.163,29 58.4,30.1 43.65,30.65 15.3,31.025 55,31.5 90,31.5 93,31.5 58.6,32 52.435,32.625 65.76,33.179 11.366,33.666 95.073,37.217 49.563,37.883 65.588,38.2 57.05,38.325 54.6,39.6 95.073,39.625 51.825,39.811 47.597,41.3 20,42.5 21.5,42.5 49.205,43.28 49.165,45.175 54,45.3 59.9,45.3 27.5,45.5 32.5,46.5 17,47 20,47 30.5,47 36.5,47 27.5,47.5 16,48 16,49 27,49 30.5,49 35.5,49 30.5,51 13.764,51.129 12.271,52.051 38,52.125 39,52.125 40,52.125 14,52.625 36.5,52.625 37.25,52.625 40.525,52.886 30.5,53 12.179,53.375 35.75,53.375 36.5,53.375 37.25,53.375 13.764,54.017 40.471,54.017 35.75,54.125 36.5,54.125 37.25,54.125
LED_WORK: R32.2 U12.62 | length 23.8
  Top Layer w0.203: U12.62 40.425,28.15 v1(40.775,28.5) ; v1(40.775,44.257) R32.2
  Bottom Layer w0.203: v1(40.775,28.5) v1(40.775,44.257)
NetC3_2: C3.2 C14.1 F5.2 L2.2 | length 19.1
  Top Layer w1.27: L2.2 14.989,73.425 15.424,73.86 C14.1 26.148,73.86 26.908,73.1 F5.2
NetC10_1: C10.1 U12.5 Y1.3 | length 9.9
  Top Layer w0.203: Y1.3@32,26.233 C10.1 ; Y1.3 32.808,25.425 34.55,25.425 35.15,24.825 35.15,23.233 35.908,22.475 U12.5
NetC11_1: C11.1 U12.6 Y1.1 | length 5.9
  Top Layer w0.203: Y1.1 C11.1 33.826,21.975 U12.6
NetC22_2: C22.2 L8.2 U12.13 | length 4.4
  Top Layer w0.203: L8.2@35.114,15.729 C22.2 36.602,18.475 U12.13
NetD1_A: D1.A R32.1 | length 2.7
  Top Layer w0.254: R32.1 D1.A
NetD2_1: D2.1 D3.2 F5.1 | length 7.1
  Top Layer w1.27: F5.1 D3.2 D2.1
NetD4_A: D4.A R35.1 | length 2.6
  Top Layer w0.254: R35.1 50.693,42.407 D4.A
NetD5_2: D5.2 L5.1 U2.2 | length 13.2
  Top Layer w1.27: L5.1 57.422,66.45 D5.2 66.45,67.775 U2.2
NetF1_2: F1.2 P1.1 | length 7.4
  Top Layer w0.5: F1.2 P1.1
NetF2_2: F2.2 P2.1 | length 7.4
  Top Layer w0.5: F2.2 P2.1
NetF3_2: F3.2 P3.1 | length 8.1
  Top Layer w1.27: F3.2 79.842,86.422 81.4,87.979 P3.1
NetF4_2: F4.2 P4.1 | length 7.4
  Top Layer w0.5: F4.2 P4.1
NetL7_1: L7.1 U12.12 | length 2.8
  Top Layer w0.203: L7.1 35.832,18.975 U12.12
NetP7_1: P7.1 P19.1 R4.2 U3.7 | length 36.6
  Top Layer w0.381: U3.7 80.075,52.675 P19.1 82.95,56.8 86.625,56.8 89.7,59.875 89.7,70.791 94.584,75.675 P7.1@95.775,75.675 ; P7.1@95.63,75.521 P7.1
NetP7_2: P7.2 P19.2 R4.1 U3.6 | length 33.4
  Top Layer w0.381: U3.6 81.345,52.675 P19.2@81.97,53.3 ; P19.2 84.69,56 87.134,56 90.693,59.559 90.693,70.543 94.575,74.425 P7.2
NetR5_1: R5.1 U12.28 | length 8
  Top Layer w0.203: U12.28 44.925,13.3 46.925,11.3 48.983,11.3 R5.1
NetR17_1: R17.1 R18.2 | length 1.2
  Top Layer w0.203: R18.2@40.729,7.713 R17.1
NetR20_1: R20.1 R21.2 | length 1.2
  Top Layer w0.203: R21.2@43.328,7.71 R20.1
NetR23_1: R23.1 R24.2 | length 1.2
  Top Layer w0.203: R24.2 R23.1
NetR26_1: R26.1 R27.2 | length 1.2
  Top Layer w0.203: R27.2 R26.1
nRST: C9.2 J2.4 R7.2 U12.7 | length 43.6
  Top Layer w0.203: R7.2 C9.2 30.168,21.475 U12.7 38.875,21.475 v1(39.35,21.95) ; v1(53.16,24.553) 57.6,28.993 57.6,34.4 58.8,35.6 60.655,35.6 J2.4
  Bottom Layer w0.203: v1(39.35,21.95) 49.45,21.95 52.053,24.553 v1(53.16,24.553)
PGND: C3.1 C14.2 C30.1 C31.1 C34.2 C35.1 C36.1 C37.2 C38.1 C39.1 C40.1 C41.1 D3.1 D5.1 L3.2 L6.1 P12.1 P12.3 P12.5 P12.7 P12.9 P12.11 U2.0 U2.3 U2.5 | length 46.1
  Top Layer w0.508: C38.1 C37.2 41.489,61.977 C36.1 43.614,62.152 C35.1 ; C30.1 47.143,69.163 C31.1 C41.1 50.856,69.163 ; D5.1 66.625,62.25 67.05,62.675 U2.5 72.3,62.675
  Top Layer w1.27: L3.2 15,69.325 22.03,69.325 C14.2 23.93,67.425 D3.1 ; C40.1 C30.1 ; v1(67.586,66.075) U2.3 v1(73.84,66.075)
  other v1: 32.148,55.25 33.5,55.25 34.5,55.25 38.25,55.25 39.25,55.25 40,55.25 41,55.25 42,55.25 49.5,55.375 53,55.375 58.25,55.375 66.5,55.375 71.5,55.375 35.75,55.5 36.5,55.5 37.25,55.5 72.5,56 74.5,56 35.75,56.25 36.5,56.25 37.25,56.25 42,56.5 13.468,56.75 36.5,57 37.25,57 48.5,57 50,57 51.5,57 53,57 60.5,57 63,57 65,57 67.5,57 70,57 38,57.5 39,57.5 40,57.5 41,57.5 42,57.5 47,57.5 61.5,58 62.5,59 32.25,59.25 33.75,59.25 35,59.25 64.5,59.5 67,59.5 69.5,59.5 72.5,59.5 77.5,59.5 79.5,59.5 82,59.5 84.5,59.5 13.3,59.96 52,60 72.5,61 86,61 52,62 28.367,62.455 33.347,62.638 13.3,62.95 19.623,62.95 23.859,62.95 75,63 87,63 72.607,63.342 52,64 65,64.5 67,64.5 62.5,65 74.5,65 72.607,65.066 26.148,65.25 31,65.25 32,65.25 33,65.25 34,65.25 87,65.5 21.297,65.506 13.344,65.948 16.529,65.948 53,66 66.871,66.171 34,66.75 43,67 54.5,67.5 87,67.5 12,67.75 13,67.75 14,67.75 15,67.75 34,68.5 74.5,68.5 14,68.75 15,68.75 51.5,69 56.45,69.466 58.923,69.475 60.965,69.475 62.7,69.475 64.501,69.475 14,69.75 15,69.75 31,70 32,70 33,70 34,70 39,70 41,70 43,70 45,70 47,70 87,70 74.5,70.5 12,70.75 13,70.75 14,70.75 15,70.75 85.5,72 37,73 39,73 48.5,73 51,73 55,73 58,73 61,73 64,73 67.5,73 70.5,73 73.5,73 76.5,73 79.5,73 84,73
SWCLK: J2.3 U12.49 | length 26.2
  Top Layer w0.203: U12.49 46.925,28.325 51.925,33.325 51.925,35 52.475,35.55 57.05,35.55 57.6,36.1 57.6,37.625 58.3,38.325 63.12,38.325 J2.3
SWDIO: J2.2 U12.46 | length 25.9
  Top Layer w0.203: U12.46 48.741,23.491 52.82,23.491 60.725,31.396 60.725,34.825 61.525,35.625 65.76,35.625 J2.2
U4_RX: P16.1 U12.52 | length 9
  Top Layer w0.203: U12.52 45.425,31.5 P16.1
U4_TX: P16.2 U12.51 | length 9.9
  Top Layer w0.203: U12.51 45.925,29.46 P16.2
U5_RX: P15.1 U12.54 | length 12.2
  Top Layer w0.203: U12.54 44.425,33.24 P15.1
U5_TX: P15.2 U12.53 | length 14.2
  Top Layer w0.203: U12.53 44.925,33.225 47.325,35.625 49.35,35.625 P15.2
VBAT+: C1.1 C2.2 C4.1 C5.2 C6.1 C7.1 C8.1 C12.1 C13.1 F1.1 F2.1 F3.1 F4.1 J8.1 L2.1 P5.1 | length 52.2
  Top Layer w0.762: 47.45,77.92 C5.2 C1.1
  Top Layer w1.27: C13.1 9.545,78.525 L2.1 ; F4.1 15.57,81.47 15.64,81.4 15.64,81.205 17.6,79.245 C6.1 ; F2.1 32.425,81.47 32.495,81.4 32.495,81.205 34.455,79.245 C7.1 ; 47.45,77.92 C4.1 ; P5.1@47.45,90.215 P5.1 ; F1.1 66.135,81.47 66.205,81.4 66.205,81.205 68.165,79.245 C8.1 ; F3.1 80.037,81.47 80.107,81.4 80.107,81.205 82.067,79.245 C12.1
  other v1: 48.5,75.5 50,75.5 51.5,75.5 53,75.5 54.5,75.5 56,75.5 48.5,76.5 50,76.5 51.5,76.5 53,76.5 54.5,76.5 56,76.5 57.5,76.5 8,77 9,77 10,77 11,77 12,77.5 48.5,77.5 50,77.5 51.5,77.5 53,77.5 54.5,77.5 8,78 9,78 10,78 11,78 21.5,78 24,78 38.355,78 40.855,78 72.065,78 74.565,78 85.3,78 87.8,78 12,78.5 48.5,78.5 50,78.5 51.5,78.5 53,78.5 54.5,78.5 10,79 11,79 21,79 24.5,79 37.855,79 41.355,79 71.565,79 75.065,79 84.8,79 88.3,79 10,80 11,80 21,80 24,80 37.855,80 40.855,80 71.565,80 74.565,80 84.8,80 87.8,80
VBAT-: C1.2 C2.1 C4.2 C5.1 C6.2 C7.2 C8.2 C12.2 C13.2 J7.1 L3.1 P1.2 P2.2 P3.2 P4.2 P5.2 | length 51.1
  Top Layer w1.27: 7.595,69.325 L3.1 ; C7.2 v1(41.909,84.325) v1(43.586,84.325) v1(44.885,83.026) 45.875,82.036 C1.2 C5.1
  Bottom Layer w1.27: C6.2@22.55,84.575 P4.2@22.55,92.1 ; C7.2 P2.2 ; C4.2@56.285,83.01 P5.2 ; C8.2 P1.2 ; C12.2 86.375,91.875 P3.2
  other v1: 4,82 5,82 6,82 4,83 5,83 6,83 7,83 4,84 5,84 6,84 7,84 4,85 5,85 6,85 7,85
VBUS: C30.2 C31.2 C40.2 C41.2 D2.2 U2.1 | length 30.4
  Top Layer w1.27: D2.2 46.55,71.625 47.787,71.625 C31.2 C41.2 66.013,70.737 67.275,69.475 U2.1
VCC3.3: C15.2 C16.2 C24.2 C25.1 L4.1 P11.8 P11.10 P11.12 VR1.2 | length 28.6
  Top Layer w0.635: C16.2 L4.1 C15.2 ; C15.2@22.507,37.419 VR1.2@22.507,39.8
  Top Layer w1.27: P11.8 P11.10 P11.12 15.675,50.6 11.925,46.85 C24.2 C25.1 16.482,45.8 VR1.2@22.507,45.8
VCC3P3_CORE: C17.2 C18.2 C19.2 C20.2 C21.2 C27.2 J1.2 J2.1 L4.2 L8.1 P6.1 P8.1 P9.1 P10.1 P13.1 P13.2 P14.1 P14.2 P15.3 P16.3 R7.1 R35.2 U12.1 U12.19 U12.32 U12.48 U12.64 | length 251.3
  Top Layer w0.254: v1(23.95,16.375) 24.609,15.716 L8.1 37.043,12.2 v1(40.225,12.2) C18.2 40.225,13.2 40.425,13.4 U12.19 ; v1(23.95,23.4) R7.1 ; U12.1 36.875,24.475 35.925,25.425 35.925,28.8 38.475,28.8 C20.2 39.425,27.85 U12.64 ; v1(46.325,13) 47,13 C21.2 ; 46.485,40.24 R35.2 ; U12.32 46.925,13.4 C21.2@47.125,13.2 ; U12.48 50.5,24.475 53.19,27.165 P16.3
  Top Layer w0.4: v1(23.95,29.025) 35.7,29.025 35.925,28.8
  Top Layer w0.508: P10.1 P9.1 2.6,13.29 4.33,11.56 P14.1 P14.2 19.135,11.56 v1(23.95,16.375) ; 46.37,40.125 46.485,40.24 ; P15.3 55.445,39.18 67.345,39.18 J2.1 69.104,36.429 69.104,36.229 J1.2 ; P13.2 P13.1 94.67,43.43 96.4,41.7 P6.1 P8.1
  Top Layer w0.635: C17.2 L4.2 C19.2
  Top Layer w0.8: v1@23.95,32.625 38.87,32.625 46.37,40.125 49.99,40.125 P15.3
  Top Layer w1.143: C19.2 v1@23.95,32.625
  Bottom Layer w0.254: v1(40.225,12.2) 45.525,12.2 v1(46.325,13) ; P16.3 P15.3
  Bottom Layer w0.508: J2.1 84.465,36.925 P13.2
  Bottom Layer w0.762: v1(23.95,16.375) v1@23.95,23.4 ; v1(23.95,23.4) v1(23.95,29.025) v1@23.95,32.825
  other v1: 23.95,32.375 23.95,32.925
VCC3P3_ISP: J1.1 R6.2 | length 4.6
  Top Layer w0.203: R6.2 R6.2@69.6,29.675 ; R6.2@69.6,29.65 R6.2@69.6,29.675 ; J1.1 R6.2@69.6,29.675
VCC+5V: C23.1 C26.2 C34.1 C35.2 C36.2 C37.1 C38.2 C39.2 C42.2 L5.2 L9.1 L9.2 P11.2 P11.4 P11.6 P12.2 P12.4 P12.6 P12.8 P12.10 P12.12 U2.4 U3.3 VR1.3 | length 177
  Top Layer w0.254: 34,46.082 71.518,46.082 v1(77.262,40.338) ; U2.4 72.825,64.375 73.575,63.625 C39.2 v1(72.825,58.2) ; v1(80.888,40.338) 81.35,40.8 C42.2 ; C42.2@81.345,41.855 U3.3
  Top Layer w1.27: P12.2 P12.4 P12.6 P12.8 P12.10 P12.12 30.01,59.29 32.825,56.475 34.075,56.475 v1(37.848,60.247) C36.2 ; P11.6 P11.4 P11.2 29.157,50.349 C23.1 ; VR1.3 24.807,40.825 C23.1 ; L9.1@34,53.3 34,46.082 C26.2 C23.1 ; C37.1@40.239,60.28 C34.1 48.295,60.28 50.175,58.4 L5.2
  Bottom Layer w0.254: v1(37.848,60.247) 39.095,59 44.118,59 46.943,56.175 70.8,56.175 v1(72.825,58.2) ; v1(77.262,40.338) v1(80.888,40.338)
pads on no net: U3.5 U12.2 U12.3 U12.4 U12.16 U12.17 U12.24 U12.25 U12.29 U12.30 U12.41 U12.56 U12.57 U12.61 Y1.2 Y1.4

## Polygon pours and split planes (outlines as drawn)
AGND on Bottom Layer "Bottom Layer-AGND" (solid, remove dead copper, pour order 0): 49.119,7.266 48.753,6.9 48.4,6.9 48,6.5 48,5 49.4,3.6 49.4,0.8 48.9,0.3 38.9,0.3 38.1,1.1 38.1,8.7 38.7,9.3 48.865,9.3 49.119,9.046
DGND on Bottom Layer "Bottom Layer-DGND" (solid, remove dead copper, pour order 50): 0,50.01 0,4.65 4.65,0 94.717,0 99,4.283 99,49.4 93.9,54.5 4.49,54.5
PGND on Bottom Layer "Bottom Layer-PGND" (solid, remove dead copper, pour order 46): 33.1,71.1 35.54,73.54 84.831,73.54 87.634,70.737 87.634,61.288 85.105,58.759 79.042,58.759 75.273,54.99 13.435,54.99 11.424,57.001 11.424,70.651 11.873,71.1
VBAT+ on Bottom Layer "Bottom Layer-VBAT+" (solid, remove dead copper, pour order 38): 89.992,75.175 97.425,82.608 97.425,95.7 96.175,96.95 92.375,96.95 91.275,95.85 91.275,84.165 87.829,80.718 71.718,80.718 70.245,79.245 42.33,79.245 40.9,80.675 8.3,80.675 7.375,79.75 7.375,76.875 8.225,76.025 34.05,76.025 34.9,75.175 57.575,75.175
VBAT- on Bottom Layer "Bottom Layer-VBAT-" (solid, remove dead copper, pour order 28): 8.025,85.875 4.225,85.875 3.15,84.8 3.15,81.456 3.581,81.025 5.792,81.025 7.117,82.35 41.2,82.35 41.75,81.8 70.75,81.8 71.95,83 87.825,83 89.325,84.5 89.325,90.925 88.1,92.15 84.95,92.15 84.65,91.85 84.65,87.55 82.925,85.825 76.5,85.825 75.9,86.425 75.9,91.1 74.925,92.075 70.95,92.075 70.375,91.5 70.375,87.6 68.6,85.825 60.775,85.825 59.05,87.55 59.05,91.65 58.3,92.4 54.6,92.4 53.525,91.325 53.525,87.625 52.325,86.425 44.75,86.425 42.2,88.975 42.2,91.275 41.7,91.775 37,91.775 36.6,91.375 36.6,86.95 35.425,85.775 27.125,85.775 25.35,87.55 25.35,91.25 24.5,92.1 20.6,92.1 19.8,91.3 19.8,87.4 18.275,85.875
AGND on Top Layer "Top Layer-AGND" (solid, remove dead copper, pour order 2): 49.2,7.1 49,6.9 48.4,6.9 48,6.5 48,5 49.4,3.6 49.4,0.8 48.9,0.3 38.9,0.3 38.1,1.1 38.1,8.7 38.7,9.3 49,9.3 49.2,9.1
DGND on Top Layer "Top Layer-DGND" (solid, remove dead copper, pour order 48): 0,50.01 0,4.65 4.65,0 94.717,0 99,4.283 99,49.4 93.9,54.5 4.49,54.5
NetD2_1 on Top Layer "Top Layer-NetD2_1" (solid, remove dead copper, pour order 8): 35.572,65 34.624,65.948 34.624,70.983 35.494,71.853 37.232,71.853 37.855,71.23 37.855,69.523 38.326,69.052 41.948,69.052 42.214,68.786 42.214,66.011 41.203,65
NetC3_2 on Top Layer "Top Layer-NetC3_2" (solid, remove dead copper, pour order 44): 36.75,65
PGND on Top Layer "Top Layer-PGND" (solid, remove dead copper, pour order 42): 33.1,71.1 35.54,73.54 84.831,73.54 87.634,70.737 87.634,61.288 85.105,58.759 79.042,58.759 75.273,54.99 13.435,54.99 11.424,57.001 11.424,70.651 11.873,71.1
NetC3_2 on Top Layer "Top Layer-NetC3_2 1" (solid, remove dead copper, pour order 40): 11.424,72.099 11.873,71.65 31.85,71.65 32.69,72.49 32.69,74.591 31.343,75.937 12.736,75.937 11.424,74.625
VBAT- on Top Layer "Top Layer-VBAT-" (solid, remove dead copper, pour order 36): 2.05,95.55 3.75,97.25 6.721,97.25 8.575,95.396 8.575,87.166 10.2,85.541 10.209,82.865 9.694,82.35 7.117,82.35 6.6,81.833 6.6,71.8 7.6,70.8 10.25,70.8 10.65,70.4 10.65,67.75 10.325,67.425 5.791,67.425 2.05,71.166
VBAT+ on Top Layer "Top Layer-VBAT+" (solid, remove dead copper, pour order 34): 12.5,79 12.5,77.179 10.975,75.654 10.975,72.343 10.257,71.625 7.875,71.625 7.375,72.125 7.375,79.75 8.276,80.651 10.849,80.651
VBAT+ on Top Layer "Top Layer-VBAT+ 1" (solid, remove dead copper, pour order 32): 77.458,81.517 77.458,78.682 78.79,77.35 87.909,77.35 88.575,78.016 88.575,79.972 87.397,81.15 83.262,81.15 81.865,82.547 78.488,82.547
VBAT+ on Top Layer "Top Layer-VBAT+ 2" (solid, remove dead copper, pour order 30): 63.2,81.785 63.2,78.215 64.065,77.35 74.738,77.35 75.788,78.4 75.788,80.377 75.015,81.15 70.028,81.15 68.631,82.547 63.962,82.547
VBAT+ on Top Layer "Top Layer-VBAT+ 3" (solid, remove dead copper, pour order 26): 55.737,79.825 53.525,82.037 53.525,86.331 52.6,87.256 52.6,92.41 52.06,92.95 45.986,92.95 44.885,91.849 44.885,85.715 46.985,83.615 46.986,80.49 46.825,80.33 46.825,76.32 47.97,75.175 57.575,75.175 58.923,76.523 58.923,79.052 58.15,79.825
VBAT+ on Top Layer "Top Layer-VBAT+ 4" (solid, remove dead copper, pour order 24): 29.49,81.785 29.49,78.215 30.355,77.35 40.85,77.35 42,78.5 42,79.806 40.656,81.15 36.318,81.15 34.921,82.547 30.252,82.547
VBAT+ on Top Layer "Top Layer-VBAT+ 5" (solid, remove dead copper, pour order 20): 12.635,81.785 12.635,80.334 15.619,77.35 24.173,77.35 25.223,78.4 25.223,80.377 24.45,81.15 21.297,81.15 19.9,82.547 13.397,82.547
NetF3_2 on Top Layer "Top Layer-NetF3_2" (solid, remove dead copper, pour order 18): 83.175,88.229 82.171,87.225 82.171,83.971 81.375,83.175 78.299,83.175 77.966,83.508 77.966,87.076 79.625,88.735 79.625,92.545 80.48,93.4 82.295,93.4 83.175,92.52
NetF1_2 on Top Layer "Top Layer-NetF1_2" (solid, remove dead copper, pour order 14): 63.2,93.029 63.2,83.969 64.044,83.125 67.99,83.125 68.715,83.85 68.715,92.695 68.06,93.35 63.521,93.35
NetF2_2 on Top Layer "Top Layer-NetF2_2" (solid, remove dead copper, pour order 12): 29.49,93.029 29.49,83.969 30.334,83.125 34.28,83.125 35.005,83.85 35.005,92.695 34.35,93.35 29.811,93.35
NetF4_2 on Top Layer "Top Layer-NetF4_2" (solid, remove dead copper, pour order 10): 12.635,93.029 12.635,83.983 13.493,83.125 17.425,83.125 18.15,83.85 18.15,92.695 17.495,93.35 12.956,93.35

## Keep-outs
Keep-Out Layer:
  the board outline again, w0.152

## Other copper
Top Layer:
  rectangle net PGND: 83.187,63.342 85.5,68.175
  region net VCC3P3_CORE: 24.725,15.6 23.2,15.6 23.187,15.612 23.95,16.375
  region net VCC3P3_CORE: 51.925,38.2 54.275,38.2 54.425,38.05 53.3,36.925 53.19,36.925
  region net VCC3P3_CORE: 46.475,41.075 47.197,40.353 47.197,40.125 46.37,40.125
  region net VCC3.3: 15.011,49.435 15.011,47.826 16.632,46.204 15.603,45.175 11.925,45.175 11.925,46.85
  region net VCC+5V: 28.823,48.127 26.882,50.068 28.644,50.068 28.692,50.116
  region net VCC+5V: 29.234,47.501 31.174,45.561 29.412,45.561 29.365,45.513
  region net VCC+5V: 33.869,48.07 35.81,46.13 34.048,46.13 34,46.082
  region net VCC+5V: 55.525,60.45 55.325,60.45 53.038,58.162 54.85,56.35 55.7,56.35 57.425,58.075 57.425,58.325
  region net VCC+5V: 31.5,58.5 35.5,58.5 33.5,56.5
  region net NetD5_2: 57.018,68.15 57.723,68.855 65.348,68.855 65.777,68.425 67.461,68.425 67.711,68.175 65.986,66.45 61.965,66.45 59.965,64.45 58.25,64.45 57.018,65.682
  region net VBUS: 40.125,70.625 48.195,70.625 48.5,70.32 64.501,70.32 65.967,68.855 72.065,68.855 72.205,68.994 72.205,70.537 70.737,72.005 48.568,72.005 48.033,72.541 42.317,72.541 42.09,72.768 39.911,72.768 39.684,72.541
  pour cut-out: 55.25,67.45 52.372,64.572 52.372,60.337 55.259,57.45 59.5,57.45 62.372,60.322 62.372,64.628 59.55,67.45
  pour cut-out: 55.225,67.425
  region net VBAT+: 45.45,92.414 46.386,93.35 46.55,93.35 51.66,93.35 52.33,92.68 52.33,88.917 50.125,86.712 47.858,86.712 45.45,89.121
  region net NetF3_2: 79.625,87.76 79.625,92.545 80.805,93.725 81.97,93.725 83.175,92.52 83.175,89.029 81.271,87.125 80.48,87.125
  region net NetF1_2: 63.19,87.4 63.19,92.95 63.915,93.675 67.735,93.675 68.715,92.695 68.715,87.4 67.953,86.637 64.216,86.637
  region net NetF2_2: 29.48,87.4 29.48,92.95 30.205,93.675 34.025,93.675 35.005,92.695 35.005,87.4 34.243,86.637 30.506,86.637
  region net NetF4_2: 12.625,87.4 12.625,92.95 13.35,93.675 17.17,93.675 18.15,92.695 18.15,87.4 17.387,86.637 13.651,86.637
Bottom Layer:
  region net PGND: 80.225,68.6
  pour cut-out: 55.25,67.45 52.372,64.572 52.372,60.337 55.259,57.45 59.5,57.45 62.372,60.322 62.372,64.628 59.55,67.45
  region net VBAT-: 84.65,89.923 84.65,92.398 85.281,93.029 87.922,93.029 89.325,91.626 89.325,89.39 88.1,88.165 88.034,88.231 85.85,88.231
  region net VBAT-: 70.375,89.337 70.375,91.818 70.702,92.146 75.317,92.146 75.915,91.548 75.915,88.925 75.64,88.925 73.84,87.125 72.09,87.125
  region net VBAT-: 53.525,89.331 53.525,91.823 53.847,92.146 58.462,92.146 59.05,91.558 59.05,88.925 58.785,88.925 56.985,87.125 55.235,87.125
  region net VBAT-: 36.6,89.421 36.6,91.754 36.992,92.146 41.607,92.146 42.205,91.548 42.205,88.925 41.93,88.925 40.13,87.125 38.38,87.125
  region net VBAT-: 19.8,89.35 19.8,91.809 20.137,92.146 24.752,92.146 25.35,91.548 25.35,88.925 23.55,87.125 21.525,87.125

## Silkscreen, mask and mechanical layers (free items; w line width, h text height)
Top Overlay:
  circle w0.2: c90.97,43.43 r1.177
  circle w0.2: c8.03,11.56 r1.177
  lines w0.152: 12.5,54.99 86.595,54.99 ; 48.11,34.185 48.11,36.925 ; 59.44,34.185 59.44,36.925 ; 4.22,10.29 4.22,22.99 9.3,22.99 9.3,10.29 4.22,10.29 ; 89.7,32 89.7,44.7 94.78,44.7 94.78,32 89.7,32
  lines w0.2: 13.957,52.364 14.451,51.87 30.495,51.87 ; 22.556,47.565 22.556,49.33 ; 31.101,52.477 30.495,51.87 ; 36.529,50.685 36.169,50.325 32.04,50.325 30.495,51.87 ; 50.631,2.444 49.975,3.1 ; 50.631,3.756 49.975,3.1 ; 54.32,3.1 49.975,3.1 ; 71.736,33.785 71.336,34.185 ; 71.736,34.585 71.336,34.185 ; 71.736,36.525 71.336,36.925 ; 71.736,37.325 71.336,36.925 ; 71.336,34.185 72.5,34.185 72.5,36.925 71.336,36.925
  lines w0.203: 54.32,0.55 54.32,7.26 64.48,7.26 64.48,0.55 ; 54.32,3.1 64.48,3.1 ; 54.33,0.55 64.49,0.55 ; 56.86,3.1 56.86,7.26 ; 59.4,3.1 59.4,7.235 ; 61.94,3.1 61.94,7.25
  text "BAT-" at 6.58,98.725 h2 r180
  text "POWER_IN" at 58.825,98.725 h3 r180
  text "BAT+" at 95.85,98.7 h2 r180
  text "OUT4" at 21.559,98.225 h3 r180
  text "OUT3" at 39.43,98.225 h3 r180
  text "OUT2" at 72.065,98.223 h3 r180
  text "OUT1" at 86.883,98.223 h3 r180
  text "H" at 94.3,75.25 h1.5 r90
  text "L" at 94.3,73.9 h1.5 r90
  text "CAN_BUS" at 98.7,72.2 h1.5 r90
  text "5V" at 12.429,58.342 h2
  text "GND" at 10.93,56.244 h2
  text "GND" at 32.155,50.6 h2
  text "3V3" at 20.307,49.098 h2 r180
  text "5V" at 26.628,49.098 h2 r180
  text "POWER" at 54.225,43.9 h1.5
  text "WORK" at 54.225,42 h1.5
  text "U5R" at 48.7,38.4 h1.5 r90
  text "U5T" at 51.125,38.4 h1.5 r90
  text "3V3" at 53.6,38.4 h1.5 r90
  text "GND" at 56.3,38.4 h1.5 r90
  text "GND" at 60.01,38.4 h1.5 r90
  text "RST" at 62.55,38.4 h1.5 r90
  text "CLK" at 65.09,38.4 h1.5 r90
  text "DIO" at 67.63,38.4 h1.5 r90
  text "3V3" at 70.01,38.4 h1.5 r90
  text "ISP" at 72.775,34.975 h1.5
  text "U4R" at 48.685,30.1 h1.5 r90
  text "U4T" at 51.11,30.1 h1.5 r90
  text "3V3" at 53.585,30.1 h1.5 r90
  text "U1R" at 62.556,30.1 h1.5 r90
  text "U1T" at 64.981,30.1 h1.5 r90
  text "3V3" at 67.456,30.1 h1.5 r90
  text "GND" at 56.3,29.863 h1.5 r90
  text "GND" at 60.01,29.863 h1.5 r90
  text "ADC1" at 63.855,3.756 h1.5 r90
  text "ADC2" at 61.33,3.581 h1.5 r90
  text "ADC4" at 55.98,3.575 h1.5 r90
  text "ADC3" at 58.48,3.572 h1.5 r90
  text "GND" at 56.73,0.825 h3
Mechanical 15:
  circle w0.2: c9.1,3.4 r1.5
  circle w0.2: c9.1,51.59 r1.5
  circle w0.2: c89.9,51.59 r1.5
  circle w0.2: c89.9,3.4 r1.5
  lines w0.2: -42.49,0 12.5,0 12.5,54.99 -42.49,54.99 -42.49,0 ; 86.5,0 86.5,54.99 141.49,54.99 141.49,0 86.5,0